# EAGLE board 1-6 connector (EAGLE 9.6.2)
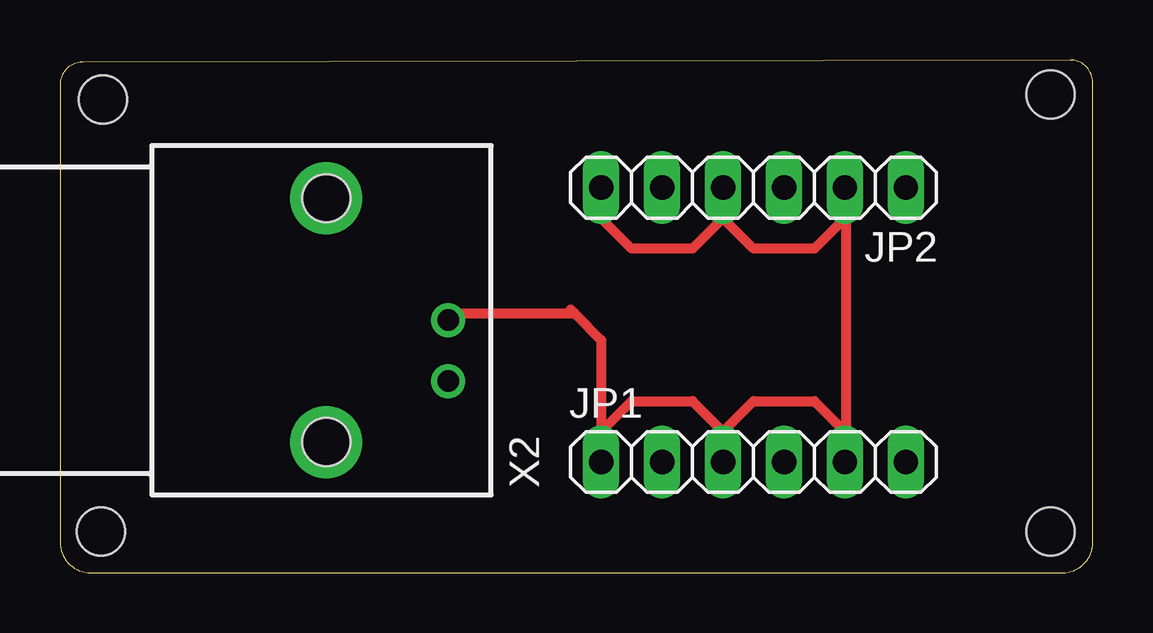
[diagram p0: board, top side]
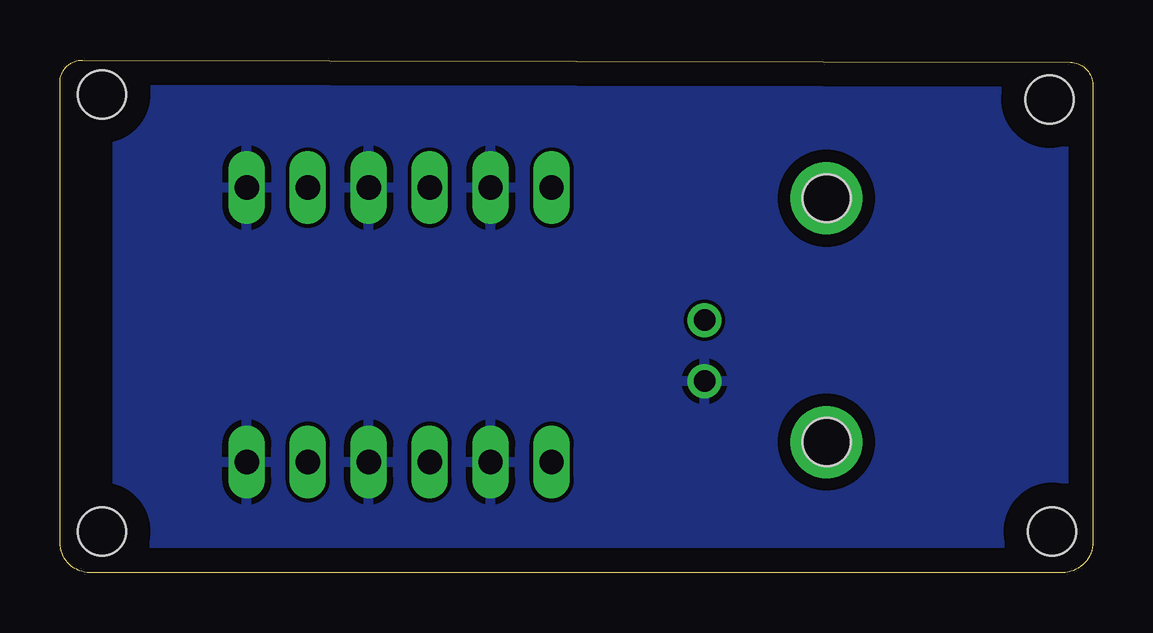
[diagram p1: board, bottom side, seen from below]

Size 43.05 x 21.36 mm. Coordinates in mm from the lower left corner, seen from the top.
Outline: 0,20.32 0,1.27 arc90 1.27,0 41.8,0 arc90 43.05,1.25 43.05,20.42 arc90 42.11,21.36 0.94,21.26 arc90 0,20.32
Copper layers (1*16): Top 0.035mm / dielectric 1.5mm / Bottom 0.035mm
Design rules "default": minimum track width 6mil, minimum drill 0.35mm, track to track 6mil, track to pad 6mil, pad to pad 6mil, via to via 6mil, smd to smd 6mil, copper to edge 40mil, drill to drill 6mil, minimum pad ring 10mil, minimum via ring 8mil, stop-mask expansion 4mil, vias tented up to drill 0mil, thermal gap 10mil
Holes 2 mm at 1.8,19.72 41.3,19.92 41.3,1.72 1.7,1.72

## Footprints (pad centres in the part's own frame; a part is rotated, then mirrored left to right if it is on the bottom)
1X06 = drill 1.016 long: 1 -6.35,0; 2 -3.81,0; 3 -1.27,0; 4 1.27,0; 5 3.81,0; 6 6.35,0
AMP_227161 = drill 0.9 pad 1.27: 1 0,-5.08; 2 -2.54,-5.08 | drill 2: P$1 -5.08,0; P$2 5.08,0 | hole 2: -5.08,0; 5.08,0

## Placement (x,y rotation side)
JP1  [1X06]  28.91,4.61 0 top
JP2  [1X06]  28.91,16.04 180 top
X2  1-227161-0  [AMP_227161]  11.1,10.52 90 top

## Library data of the parts
JP1 JP2 = pinhead
X2 = con-coax_xavi; MF: TYCO ELECTRONICS; MPN: 1-227161; OC_FARNELL: unknown; OC_NEWARK: 33B3200

## Nets
GND: JP1.2 JP1.4 JP1.6 JP2.1 JP2.3 JP2.5 X2.2
N$3: JP1.1 JP1.3 JP1.5 JP2.2 JP2.4 JP2.6 X2.1

## Tracks (layer width: path | path; a pad name or v marks a point on that pad's centre or on a via)
GND
  pour Bottom: -1.27,22.86 -1.27,-1.27 40.64,-1.27 40.64,22.86
N$3
  Top 0.406: 21.29,10.96 21.46,10.79 | 21.46,10.79 22.56,9.69 JP1.1 22.56,5.88 23.83,7.15 26.37,7.15 27.64,5.88 | JP1.3 27.64,5.88 | 27.64,5.88 28.91,7.15 31.45,7.15 32.72,5.88 JP1.5 32.79,4.68 32.79,15.97 JP2.2 32.72,14.77 31.45,13.5 28.91,13.5 27.64,14.77 | JP2.4 27.64,14.77 | 27.64,14.77 26.37,13.5 23.83,13.5 22.56,14.77 JP2.6 | 21.46,10.79 16.45,10.79 X2.1